# Altium PCB pcb_60.PcbDoc
Units mm, origin at the board's own origin, x right, y up, seen from the top; angles counter-clockwise.
Board outline 60 x 60 mm, 2 copper layers (Top Layer, Bottom Layer); 10 components, 6 nets, 96 pads, 183 vias.
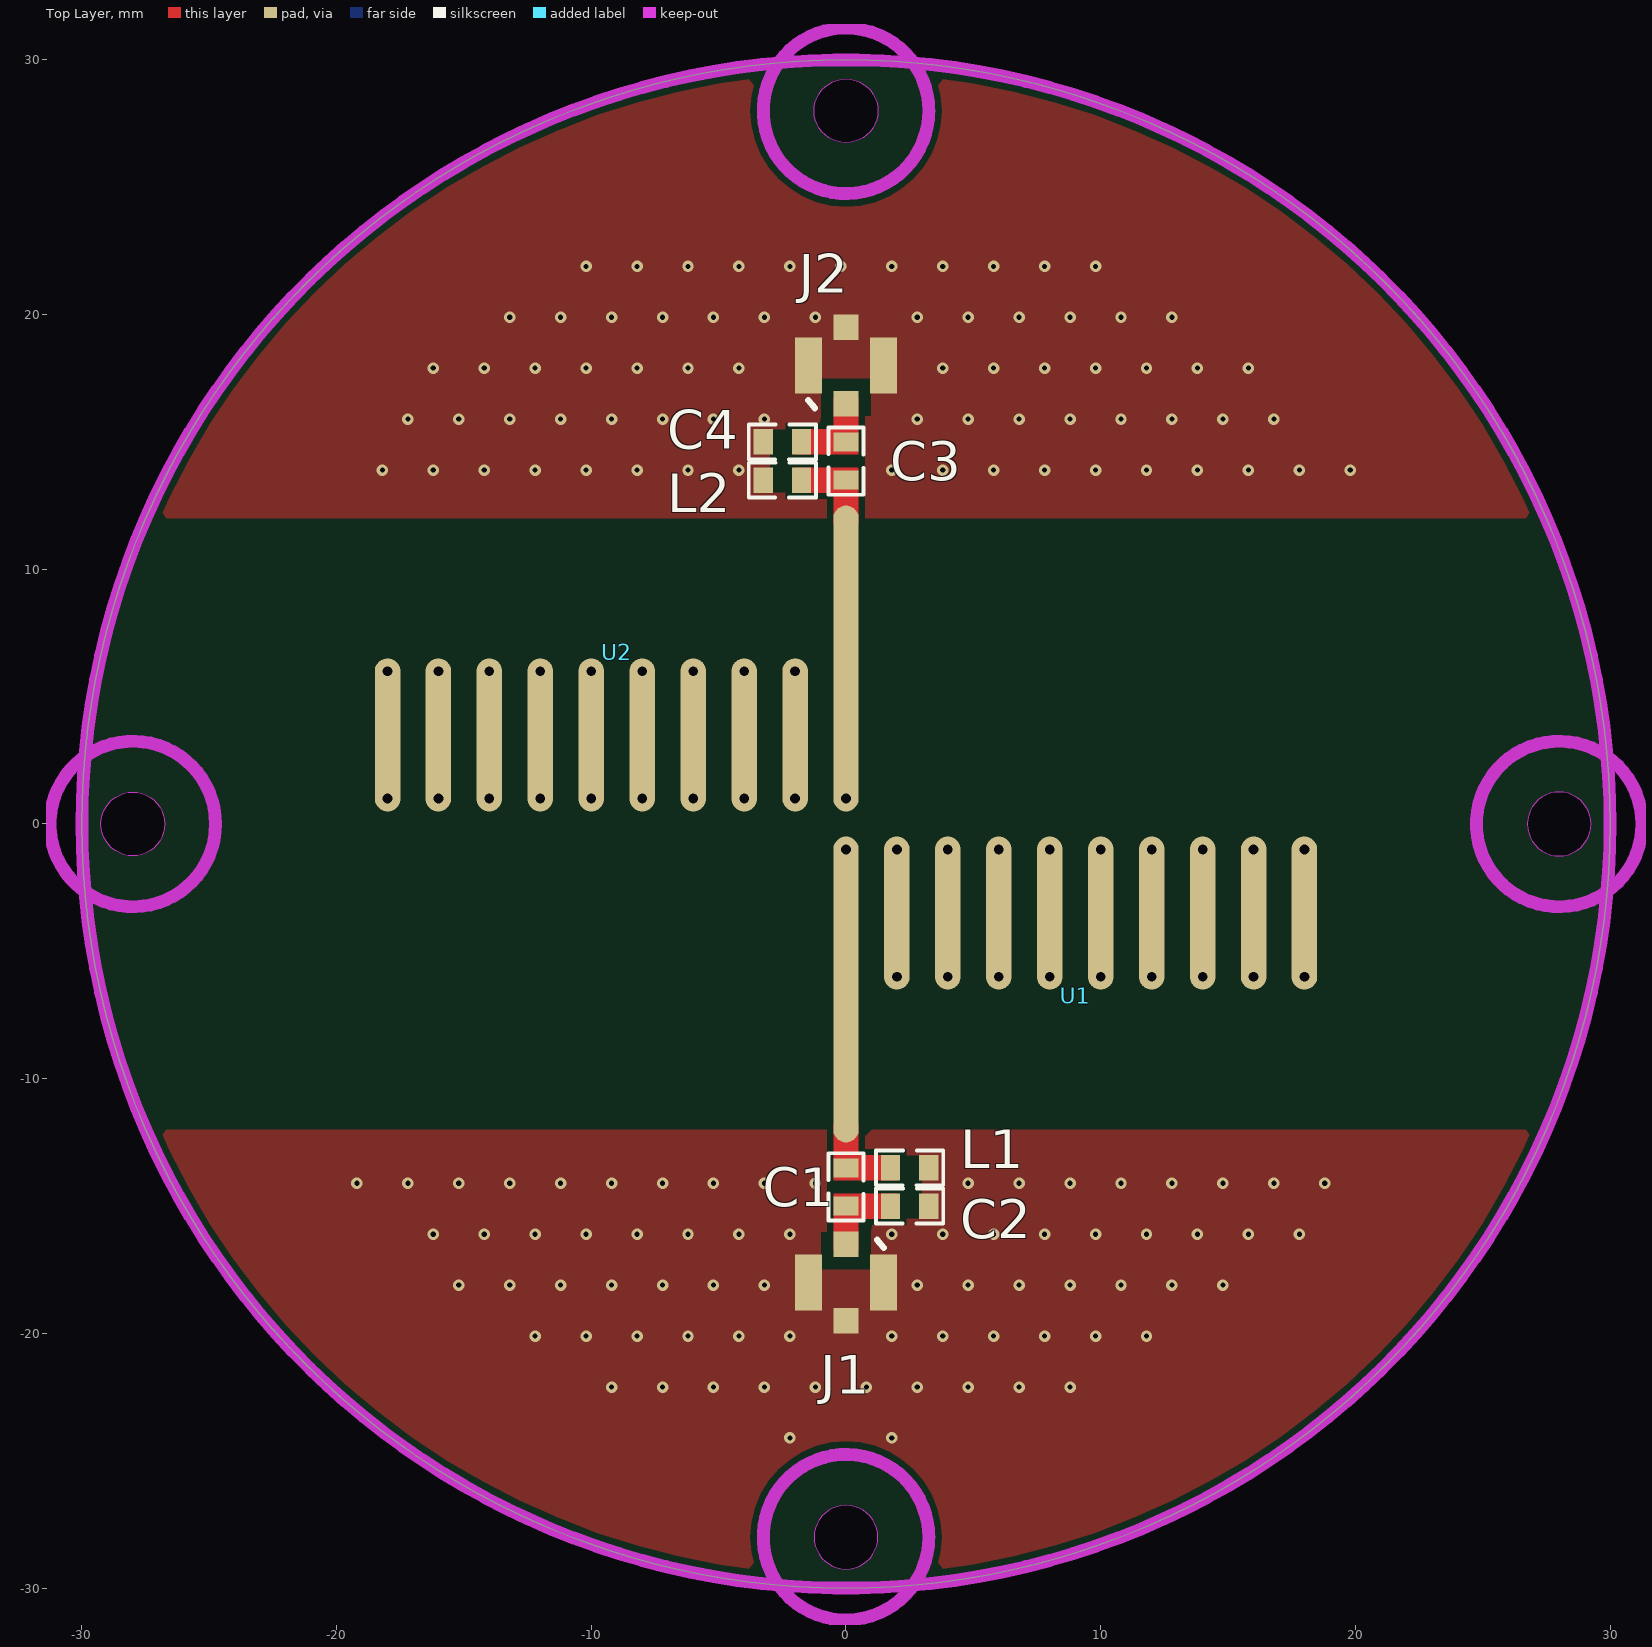
[diagram p0: Top Layer view]
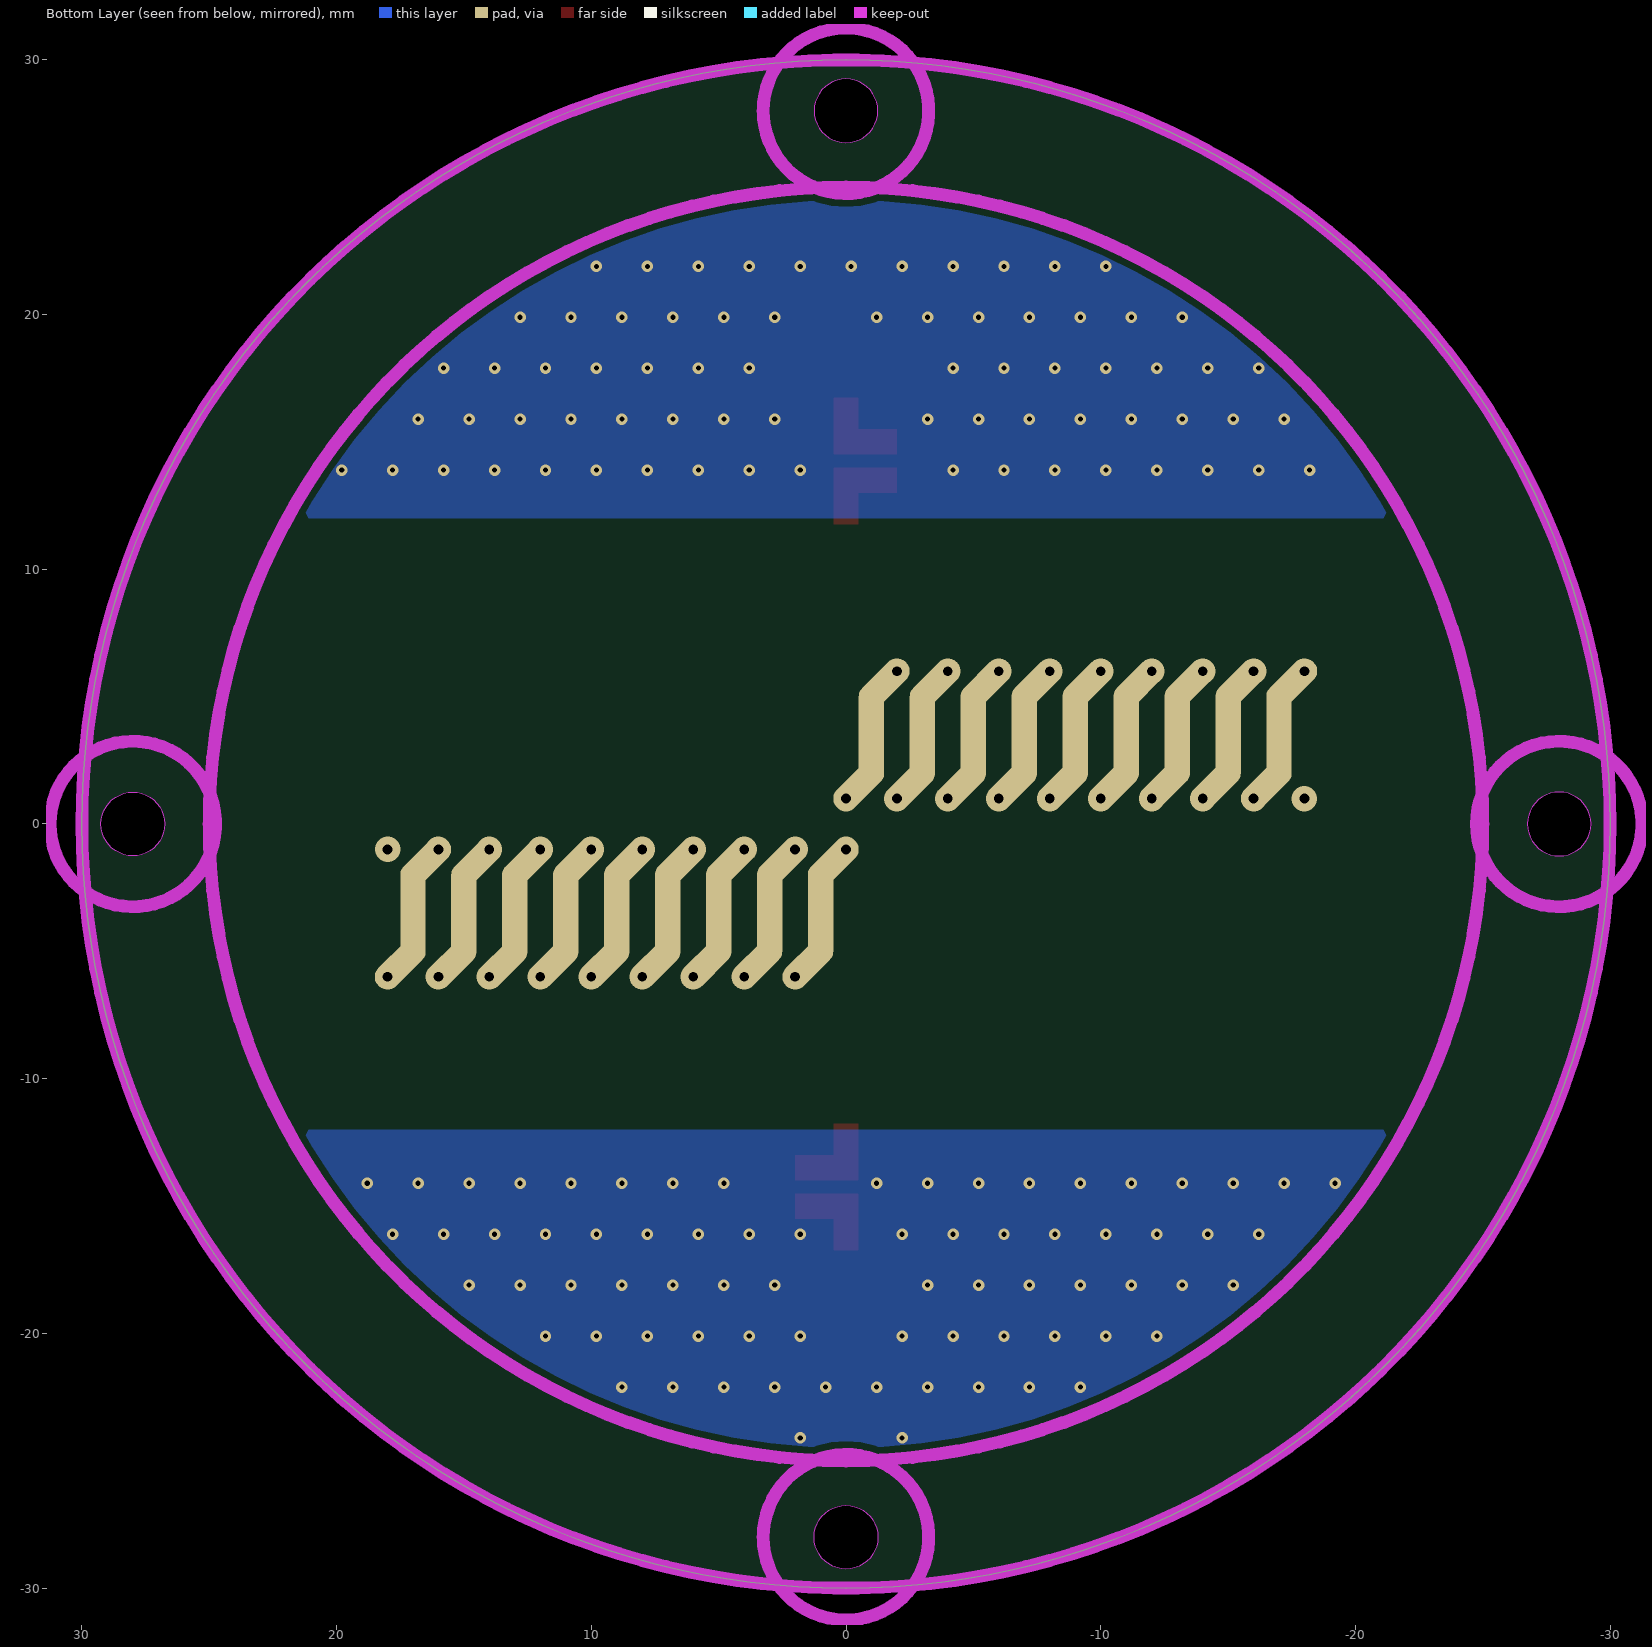
[diagram p1: Bottom Layer view, seen from below]
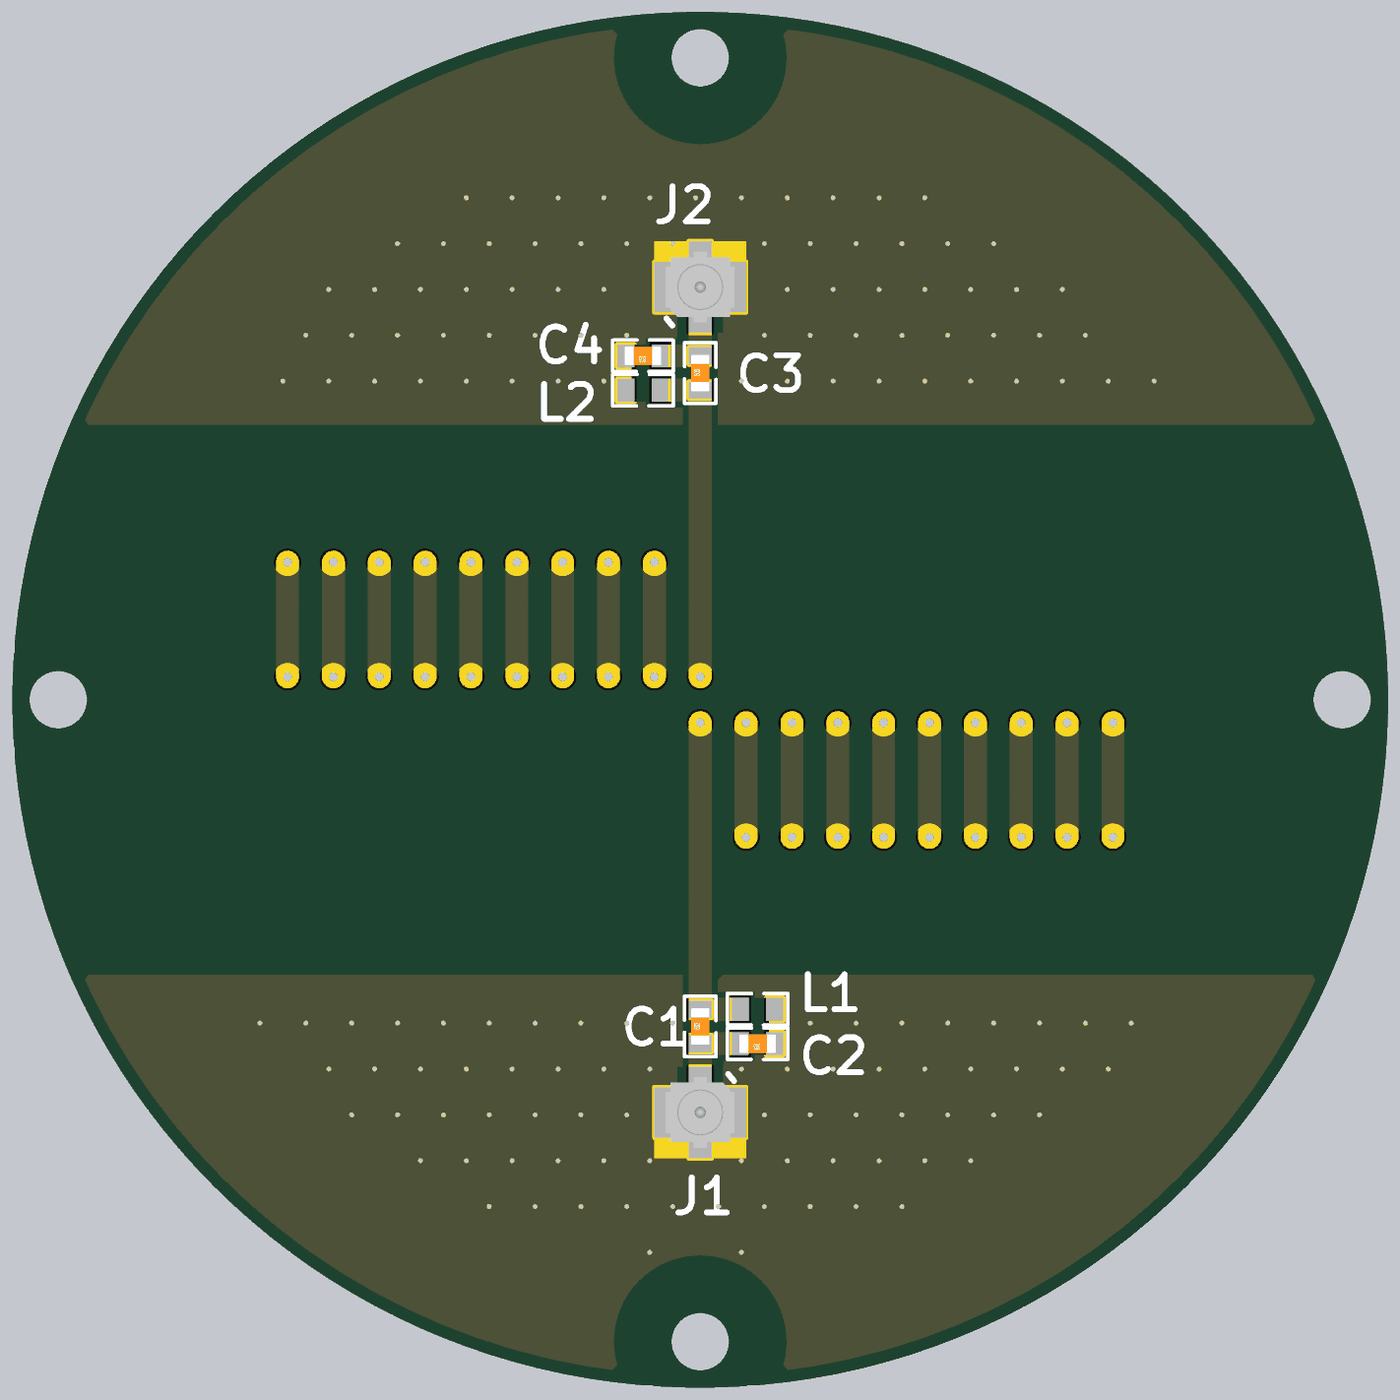
[diagram p2: 3D render of the assembled board from above, using the file's embedded part models]

## Layer stack, top to bottom
Top Solder: solder mask 0.0102, Solder Resist, Dk 3.5
Top Layer: signal copper 0.0356
Dielectric 1: dielectric 0.32, FR-4, Dk 4.8
Bottom Layer: signal copper 0.0356
Bottom Solder: solder mask 0.0102, Solder Resist, Dk 3.5

## Board outline
-30,0 ccw(c0,0) 0,-30 ccw(c0,0) 30,0 ccw(c0,0) 0,30 ccw(c0,0)
cut-out: -1.25,-28 ccw(c0,-28) 0,-29.25 ccw(c0,-28) 1.25,-28 ccw(c0,-28) 0,-26.75 ccw(c0,-28)
cut-out: 26.75,0 ccw(c28,0) 28,-1.25 ccw(c28,0) 29.25,0 ccw(c28,0) 28,1.25 ccw(c28,0)
cut-out: 0,26.75 cw(c0,28) -1.25,28 cw(c0,28) 0,29.25 cw(c0,28) 1.25,28 cw(c0,28)
cut-out: -28,-1.25 cw(c-28,0) -29.25,0 cw(c-28,0) -28,1.25 cw(c-28,0) -26.75,0 cw(c-28,0)

## Design rules (kind name [scope] priority, off if disabled: settings)
Clearance [All] p1: gap=0.254 ignorepadtopadclearanceinfootprint=FALSE except(0: Arc-Hole Track-Hole SMDPad-Hole THPad-Hole Via-Hole Fill-Hole Poly-Hole Region-Hole Text-Hole)
PolygonConnect [All] p1: connectstyle=Direct reliefconductorwidth=0.254 reliefentries=4 polygonreliefangle="90 Angle" airgapwidth=0.254
RoutingVias [All] p1: holewidth=0.711 width=1.27 viastyle="Through Hole" minholewidth=0.2 minwidth=0.45 maxholewidth=6 maxwidth=6
SolderMaskExpansion [All] p1: expansion=0.102 istentingtop=FALSE
Width [All] p1: maxlimit=2.54 minlimit=0.152 preferedwidth=0.254
30 further rules are at their usual default settings.

## Components (designator, comment, footprint, x,y, rotation, side; value= is the part's Value field where it differs from the comment)
C1 "4.7pF" R0603_C 0,-14.25 r90 top
C2 "4.7pF" R0603_C 2.5,-15 r180 top
C3 "4.7pF" R0603_C 0,14.25 r90 top
C4 "4.7pF" R0603_C -2.5,15 r180 top
J1 "IPEX" molex-73412 0,-18 r180 top
J2 "IPEX" molex-73412 0,18 r0 top
L1 "6.8nH" R0603_L 2.5,-13.5 r180 top
L2 "6.8nH" R0603_L -2.5,13.5 r0 top
U1 "ANTENNA_PCB" ANTENNA_HELICAL 0,-12 r0 top
U2 "ANTENNA_PCB" ANTENNA_HELICAL 0,12 r180 top

## Footprints (in the part's own frame and the unit in brackets; to place one, negate y for a bottom-side part, rotate by r counter-clockwise, add the part's x,y. Pads: shape width x height; smd on the part's side, far side on the other; paste and mask are expansions set on the pad)
ANTENNA_HELICAL [mm]
  round 1 smd paste-1 mask-1: 1(0,0)
  oval 1x12 smd paste-12 mask-12: ""(0,5.5)
  oval 1x2.414 smd far side rot 45 paste-1.5 mask-1.5: ""(0.5,10.5) ""(1.5,6.5) ""(2.5,10.5) ""(3.5,6.5) ""(4.5,10.5) ""(5.5,6.5) ""(6.5,10.5) ""(7.5,6.5) ""(8.5,10.5) ""(9.5,6.5) ""(10.5,10.5) ""(11.5,6.5) ""(12.5,10.5) ""(13.5,6.5) ""(14.5,10.5) ""(15.5,6.5) ""(16.5,10.5) ""(17.5,6.5)
  oval 1x4 smd far side paste-4 mask-4: ""(1,8.5) ""(3,8.5) ""(5,8.5) ""(7,8.5) ""(9,8.5) ""(11,8.5) ""(13,8.5) ""(15,8.5) ""(17,8.5)
  oval 1x6 smd paste-6 mask-6: ""(2,8.5) ""(4,8.5) ""(6,8.5) ""(8,8.5) ""(10,8.5) ""(12,8.5) ""(14,8.5) ""(16,8.5) ""(18,8.5)
molex-73412 [mm]
  rect 1x1 smd: 1(0,-1.5) 3(0,1.5)
  rect 1.05x2.2 smd: 2(1.475,0) 4(-1.475,0)
  silkscreen extent -1.47,-1.68 -1.22,-1.37, body extent -1.5,-1.54 1.5,1.54, height 1.5
R0603_C [mm]
  rect 0.75x1 smd: 1(-0.75,0) 2(0.75,0)
  silkscreen extent -1.32,-0.69 1.32,0.69, body extent -0.8,-0.4 0.8,0.4, height 0.3
R0603_L [mm]
  rect 0.75x1 smd: 1(-0.75,0) 2(0.75,0)
  silkscreen extent -1.32,-0.69 1.32,0.69, body extent -0.87,-0.47 0.87,0.47, height 0.85

## Part data
C1 C2 C3 C4: library part 4.7pF/0603/100V, "精度 ±0.25pF  / 容值 4.7pF  / 额定电压 100V  / 温漂系数（介质材料) C0G", 厂家=muRata(村田), 型号=GRM1885C2A4R7CA01D, 封装=0603, 类型=Capacitor, 订货编码=C162260
J1 J2: library part 73412-0110, "RF同轴连接器（天线座）", System=Connector, 厂家=MOLEX, 型号=734120110, 封装=SMD, 类型=IPEX插座, 订货编码=C434806
L1 L2: library part 6.8nH/0603, "高频电感  / 精度 ±0.2nH  / 额定电流 200mA  / 直流电阻（内阻） 700mΩ  / 电感值 6.8nH", 厂家=muRata(村田), 型号=LQP18MN6N8C02, 封装=0603, 类型=Inductor, 订货编码=C19227
U1 U2: library part ANTENNA_DN024, 厂家=不是器件, 型号=不是器件, 封装=不是器件, 类型=不是器件, 订货编码=不是器件

## Via types
v1: diameter 0.45, hole 0.2, Top Layer to Bottom Layer, tented both sides, 145 vias
v2: diameter 1, hole 0.38, Top Layer to Bottom Layer, 38 vias

## Nets (pads, with @x,y where several pads share a name; then routed paths per layer and width w, separated by ;. In a path a pad name is that pad's centre, name@x,y a point inside that pad or via, vN(x,y) a via of type N, cw(c..) or ccw(c..) an arc to the next point about the centre after c; other vN are vias at no path point)
GND1: C2.1 J1.2 J1.3 J1.4 L1.1
  other v1: -2.203,-24.105 1.797,-24.105 -9.203,-22.105 -7.203,-22.105 -5.203,-22.105 -3.203,-22.105 -1.203,-22.105 0.797,-22.105 2.797,-22.105 4.797,-22.105 6.797,-22.105 8.797,-22.105 -12.203,-20.105 -10.203,-20.105 -8.203,-20.105 -6.203,-20.105 -4.203,-20.105 -2.203,-20.105 1.797,-20.105 3.797,-20.105 5.797,-20.105 7.797,-20.105 9.797,-20.105 11.797,-20.105 -15.203,-18.105 -13.203,-18.105 -11.203,-18.105 -9.203,-18.105 -7.203,-18.105 -5.203,-18.105 -3.203,-18.105 2.797,-18.105 4.797,-18.105 6.797,-18.105 8.797,-18.105 10.797,-18.105 12.797,-18.105 14.797,-18.105 -16.203,-16.105 -14.203,-16.105 -12.203,-16.105 -10.203,-16.105 -8.203,-16.105 -6.203,-16.105 -4.203,-16.105 -2.203,-16.105 1.797,-16.105 3.797,-16.105 5.797,-16.105 7.797,-16.105 9.797,-16.105 11.797,-16.105 13.797,-16.105 15.797,-16.105 17.797,-16.105 -19.203,-14.105 -17.203,-14.105 -15.203,-14.105 -13.203,-14.105 -11.203,-14.105 -9.203,-14.105 -7.203,-14.105 -5.203,-14.105 -3.203,-14.105 -1.203,-14.105 4.797,-14.105 6.797,-14.105 8.797,-14.105 10.797,-14.105 12.797,-14.105 14.797,-14.105 16.797,-14.105 18.797,-14.105
GND2: C4.2 J2.2 J2.3 J2.4 L2.1
  other v1: -18.203,13.895 -16.203,13.895 -14.203,13.895 -12.203,13.895 -10.203,13.895 -8.203,13.895 -6.203,13.895 -4.203,13.895 1.797,13.895 3.797,13.895 5.797,13.895 7.797,13.895 9.797,13.895 11.797,13.895 13.797,13.895 15.797,13.895 17.797,13.895 19.797,13.895 -17.203,15.895 -15.203,15.895 -13.203,15.895 -11.203,15.895 -9.203,15.895 -7.203,15.895 -5.203,15.895 -3.203,15.895 2.797,15.895 4.797,15.895 6.797,15.895 8.797,15.895 10.797,15.895 12.797,15.895 14.797,15.895 16.797,15.895 -16.203,17.895 -14.203,17.895 -12.203,17.895 -10.203,17.895 -8.203,17.895 -6.203,17.895 -4.203,17.895 3.797,17.895 5.797,17.895 7.797,17.895 9.797,17.895 11.797,17.895 13.797,17.895 15.797,17.895 -13.203,19.895 -11.203,19.895 -9.203,19.895 -7.203,19.895 -5.203,19.895 -3.203,19.895 -1.203,19.895 2.797,19.895 4.797,19.895 6.797,19.895 8.797,19.895 10.797,19.895 12.797,19.895 -10.203,21.895 -8.203,21.895 -6.203,21.895 -4.203,21.895 -2.203,21.895 -0.203,21.895 1.797,21.895 3.797,21.895 5.797,21.895 7.797,21.895 9.797,21.895
NetC1_1: C1.1 C2.2 J1.1
NetC1_2: C1.2 L1.2 U1. U1.1
  other v2: 2,-6 4,-6 6,-6 8,-6 10,-6 12,-6 14,-6 16,-6 18,-6 0,-1 2,-1 4,-1 6,-1 8,-1 10,-1 12,-1 14,-1 16,-1 18,-1
NetC3_1: C3.1 L2.2 U2. U2.1
  other v2: -18,1 -16,1 -14,1 -12,1 -10,1 -8,1 -6,1 -4,1 -2,1 0,1 -18,6 -16,6 -14,6 -12,6 -10,6 -8,6 -6,6 -4,6 -2,6
NetC3_2: C3.2 C4.1 J2.1

## Polygon pours and split planes (outlines as drawn)
GND2 on Top Layer "GND2_L01_P003" (solid, remove dead copper, pour order 3): -27.75,12 -27.75,32 27.5,32 27.5,12
GND1 on Top Layer "GND1_L01_P000" (solid, remove dead copper, pour order 0): 27.75,-12 27.75,-32 -27.5,-32 -27.5,-12
GND2 on Bottom Layer "GND2_L02_P002" (solid, remove dead copper, pour order 2): -27.75,12 -27.75,32 27.5,32 27.5,12
GND1 on Bottom Layer "GND1_L02_P001" (solid, remove dead copper, pour order 1): 27.75,-12 27.75,-32 -27.5,-32 -27.5,-12

## Keep-outs
Bottom Layer:
  circle w0.508: c0,0 r25
Keep-Out Layer:
  circle w0.508: c0,28 r3.25
  circle w0.508: c-28,0 r3.25
  circle w0.508: c0,-28 r3.25
  circle w0.508: c28,0 r3.25
  circle w0.508: c0,0 r30

## Other copper
Top Layer:
  region net NetC3_2: 0.5,15.5 -2,15.5 -2,14.5 0.5,14.5
  region net NetC3_1: 0.5,14 -2,14 -2,13 0.5,13
  rectangle net NetC1_2: -0.5,-14 2,-13
  rectangle net NetC1_1: -0.5,-15.5 2,-14.5
  region net NetC3_2: 0.5,16.75 -0.5,16.75 -0.5,14.75 0.5,14.75
  region net NetC3_1: 0.5,13.5 -0.5,13.5 -0.5,11.75 0.5,11.75
  rectangle net NetC1_2: -0.5,-13.5 0.5,-11.75
  rectangle net NetC1_1: -0.5,-16.75 0.5,-14.75
  pour cut-out: -2,13 -3,13 -3,15.5 -2,15.5
  pour cut-out: 2,-13 3,-13 3,-15.5 2,-15.5
  pour cut-out: -1,16 -1,17.5 1,17.5 1,16
  pour cut-out: 1,-16 1,-17.5 -1,-17.5 -1,-16

## Silkscreen, mask and mechanical layers (free items; w line width, h text height)
Top Solder:
  region: 2,20 -2,20 -2,17.5 2,17.5
  rectangle: -2,-20 2,-17.5
Mechanical 1:
  circle w0.127: c0,0 r30
  circle w0.127: c28,0 r1.25
  circle w0.127: c0,28 r1.25
  circle w0.127: c-28,0 r1.25
  circle w0.127: c0,-28 r1.25